# Altium PCB PSoC6-Cardiac-PCB.PcbDoc (part 1 of 2)
Units mm, origin at the board's own origin, x right, y up, seen from the top; angles counter-clockwise.
Board outline 36.98 x 46.23 mm, 4 copper layers (Top Layer, Layer 1, Layer 2, Bottom Layer), stack 1.058 mm thick; 58 components, 40 nets, 282 pads, 88 vias.
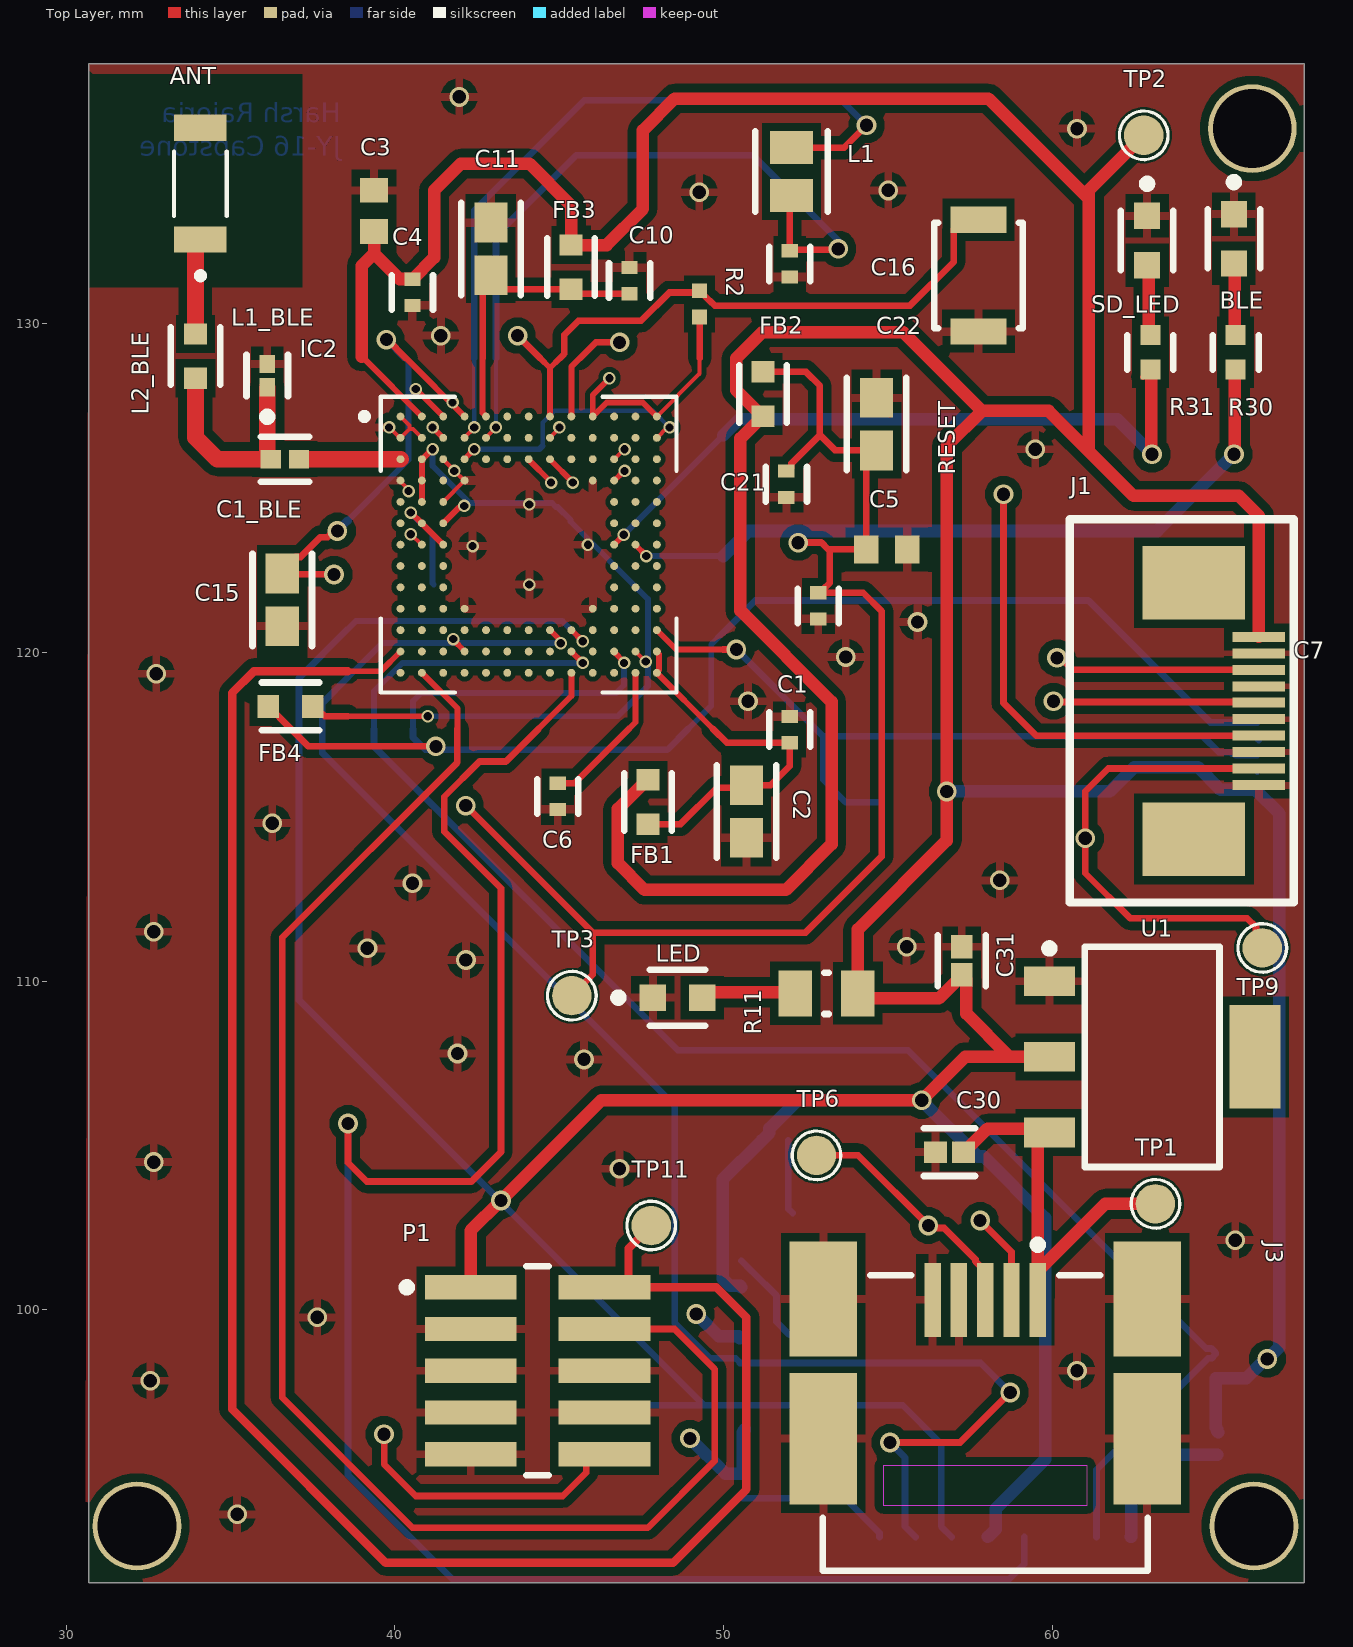
[diagram p0: Top Layer view]
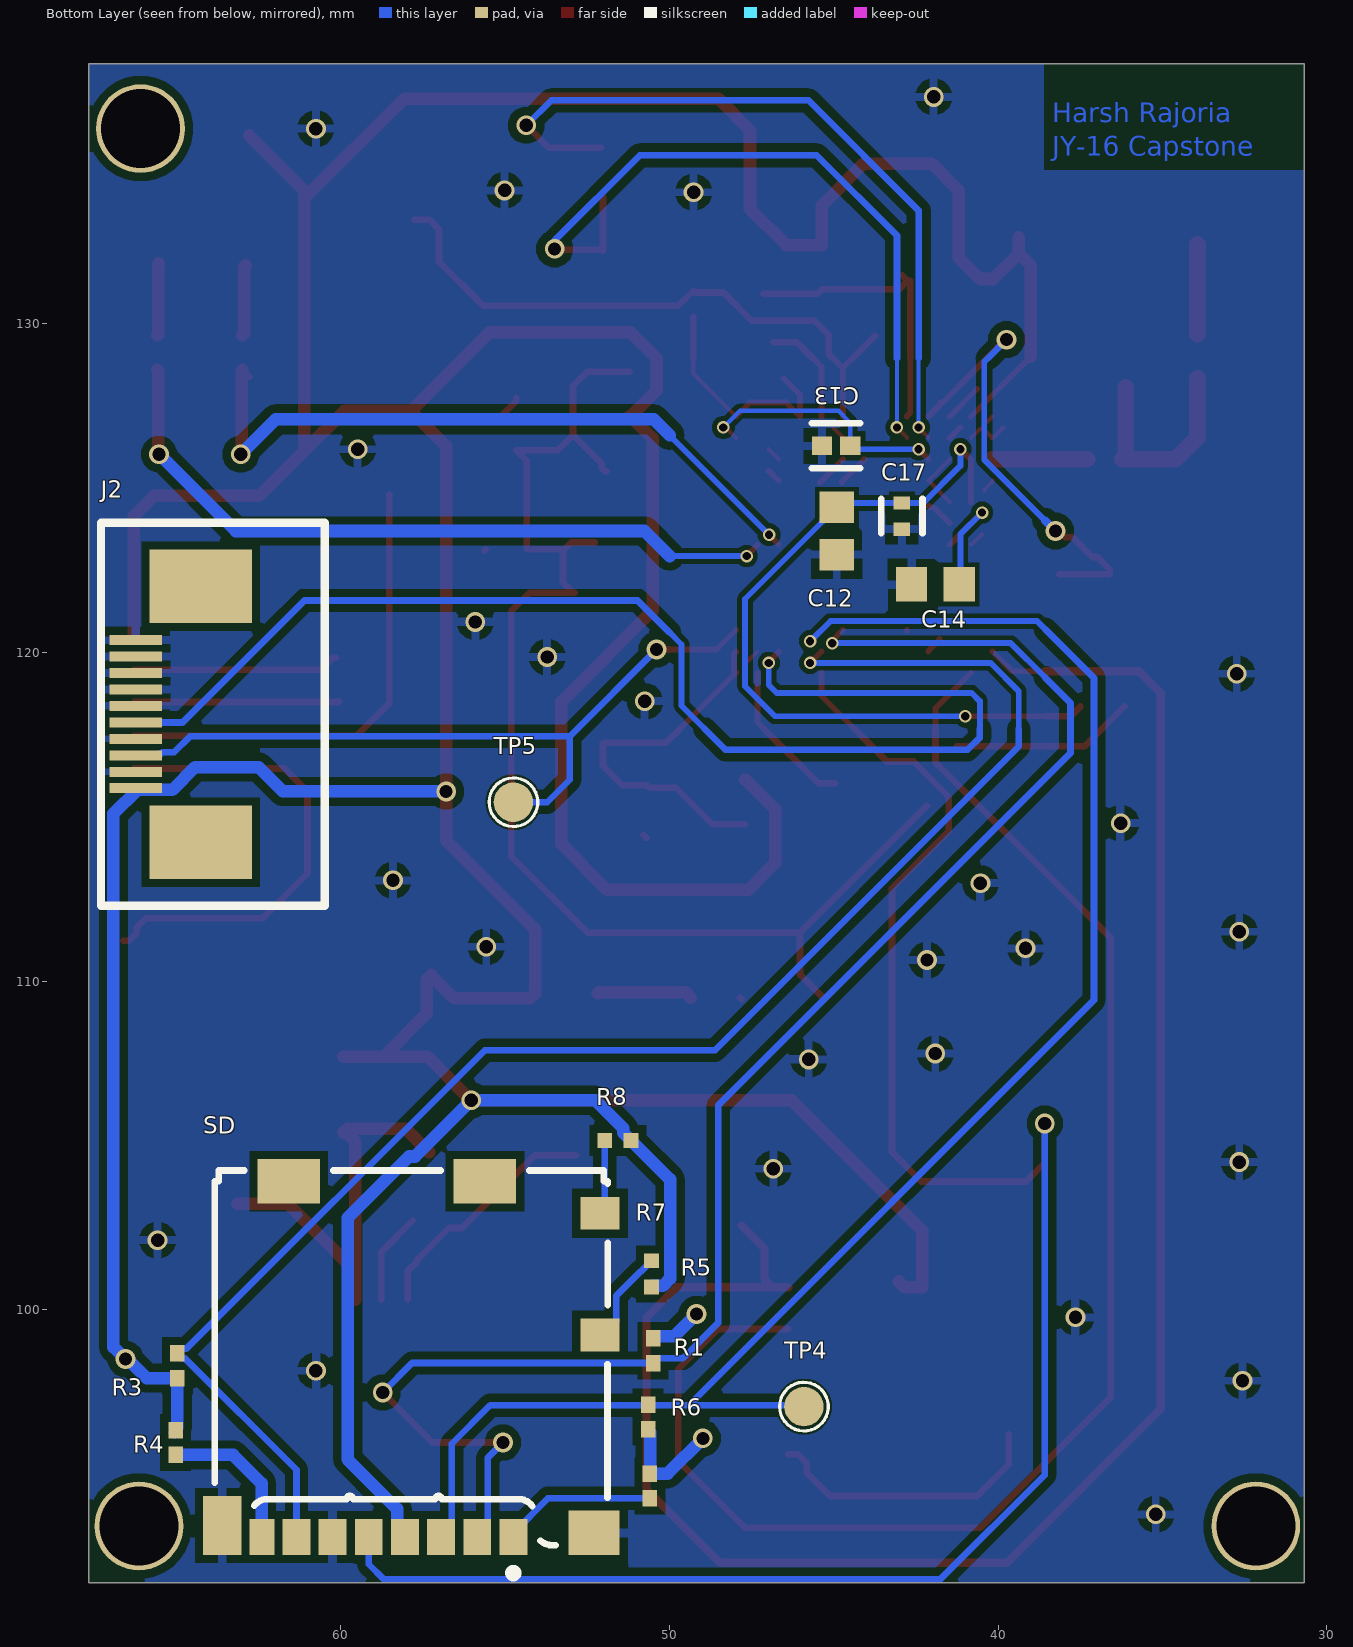
[diagram p1: Bottom Layer view, seen from below]
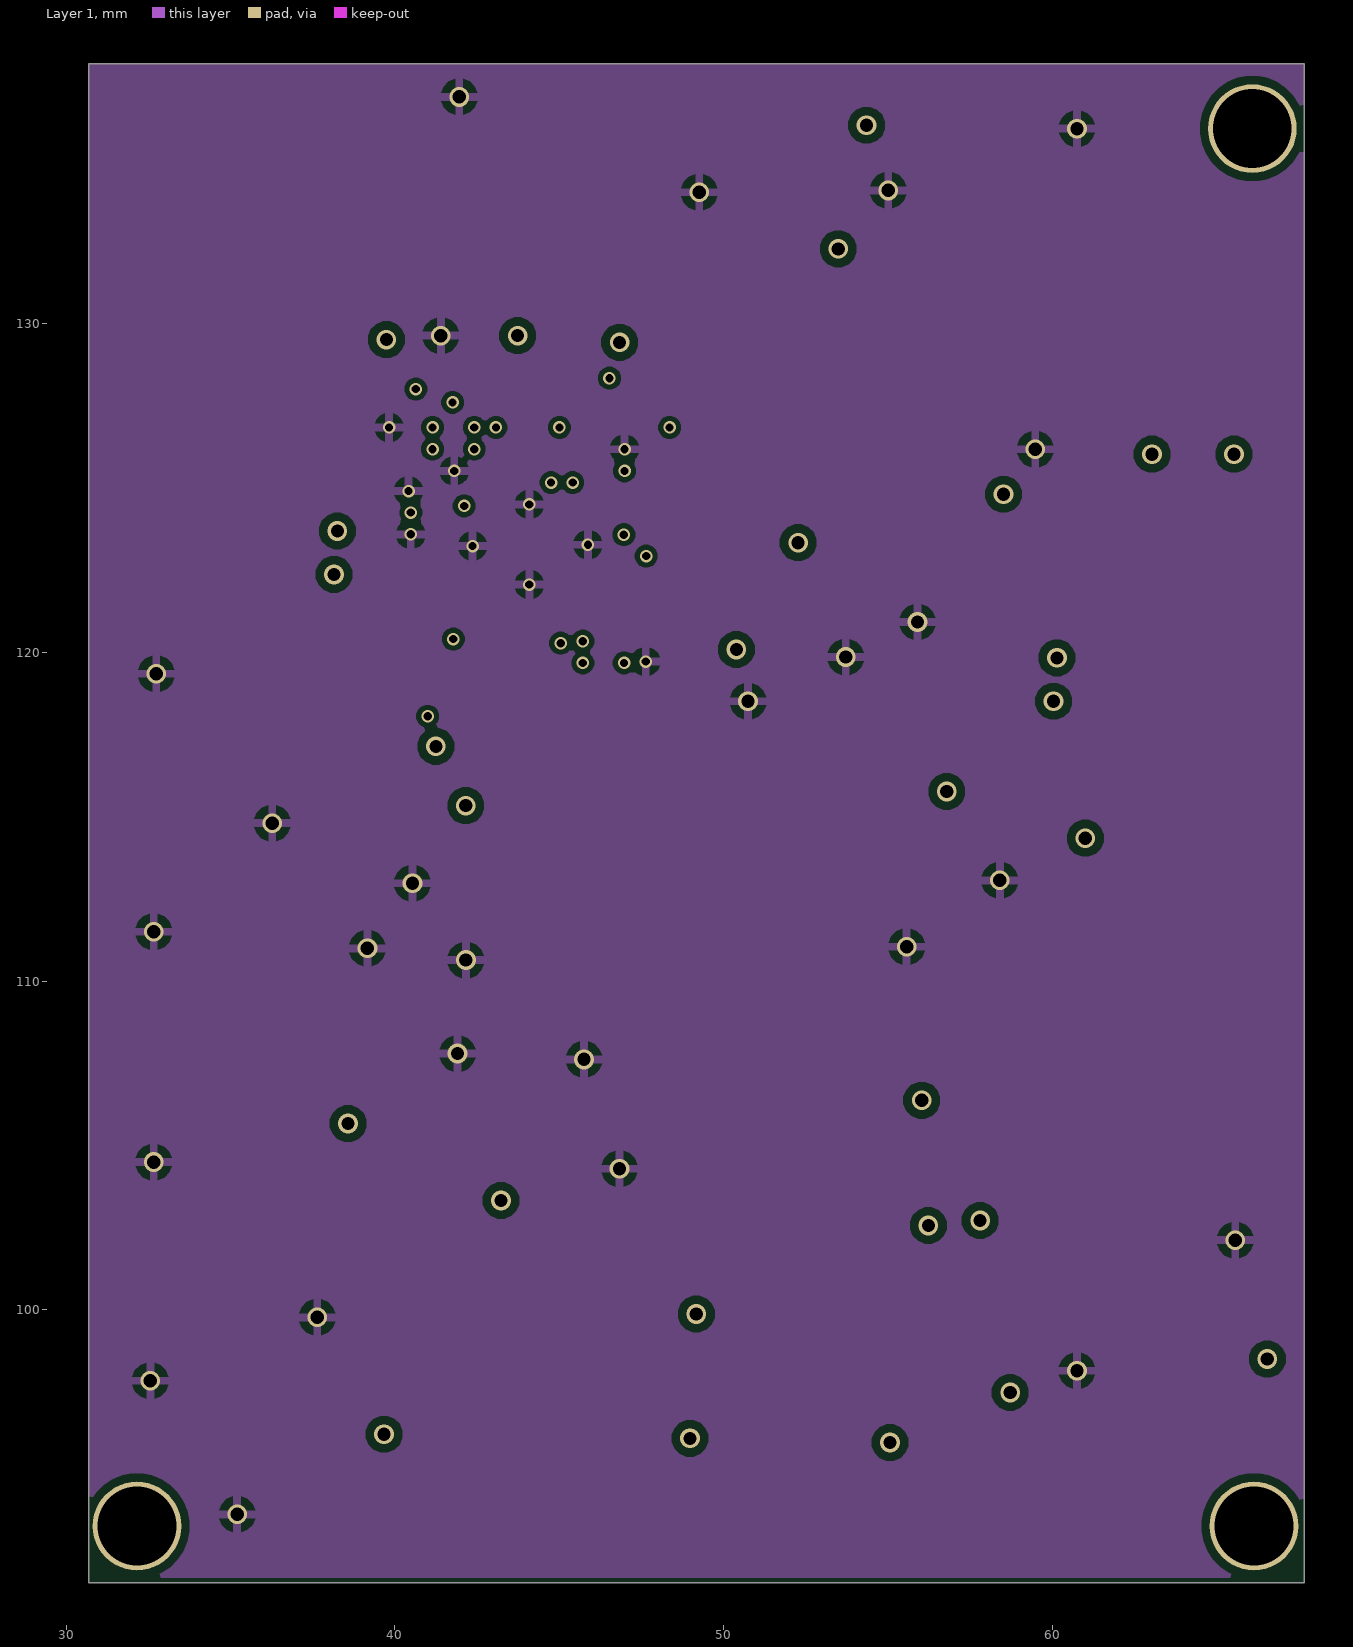
[diagram p2: Layer 1]
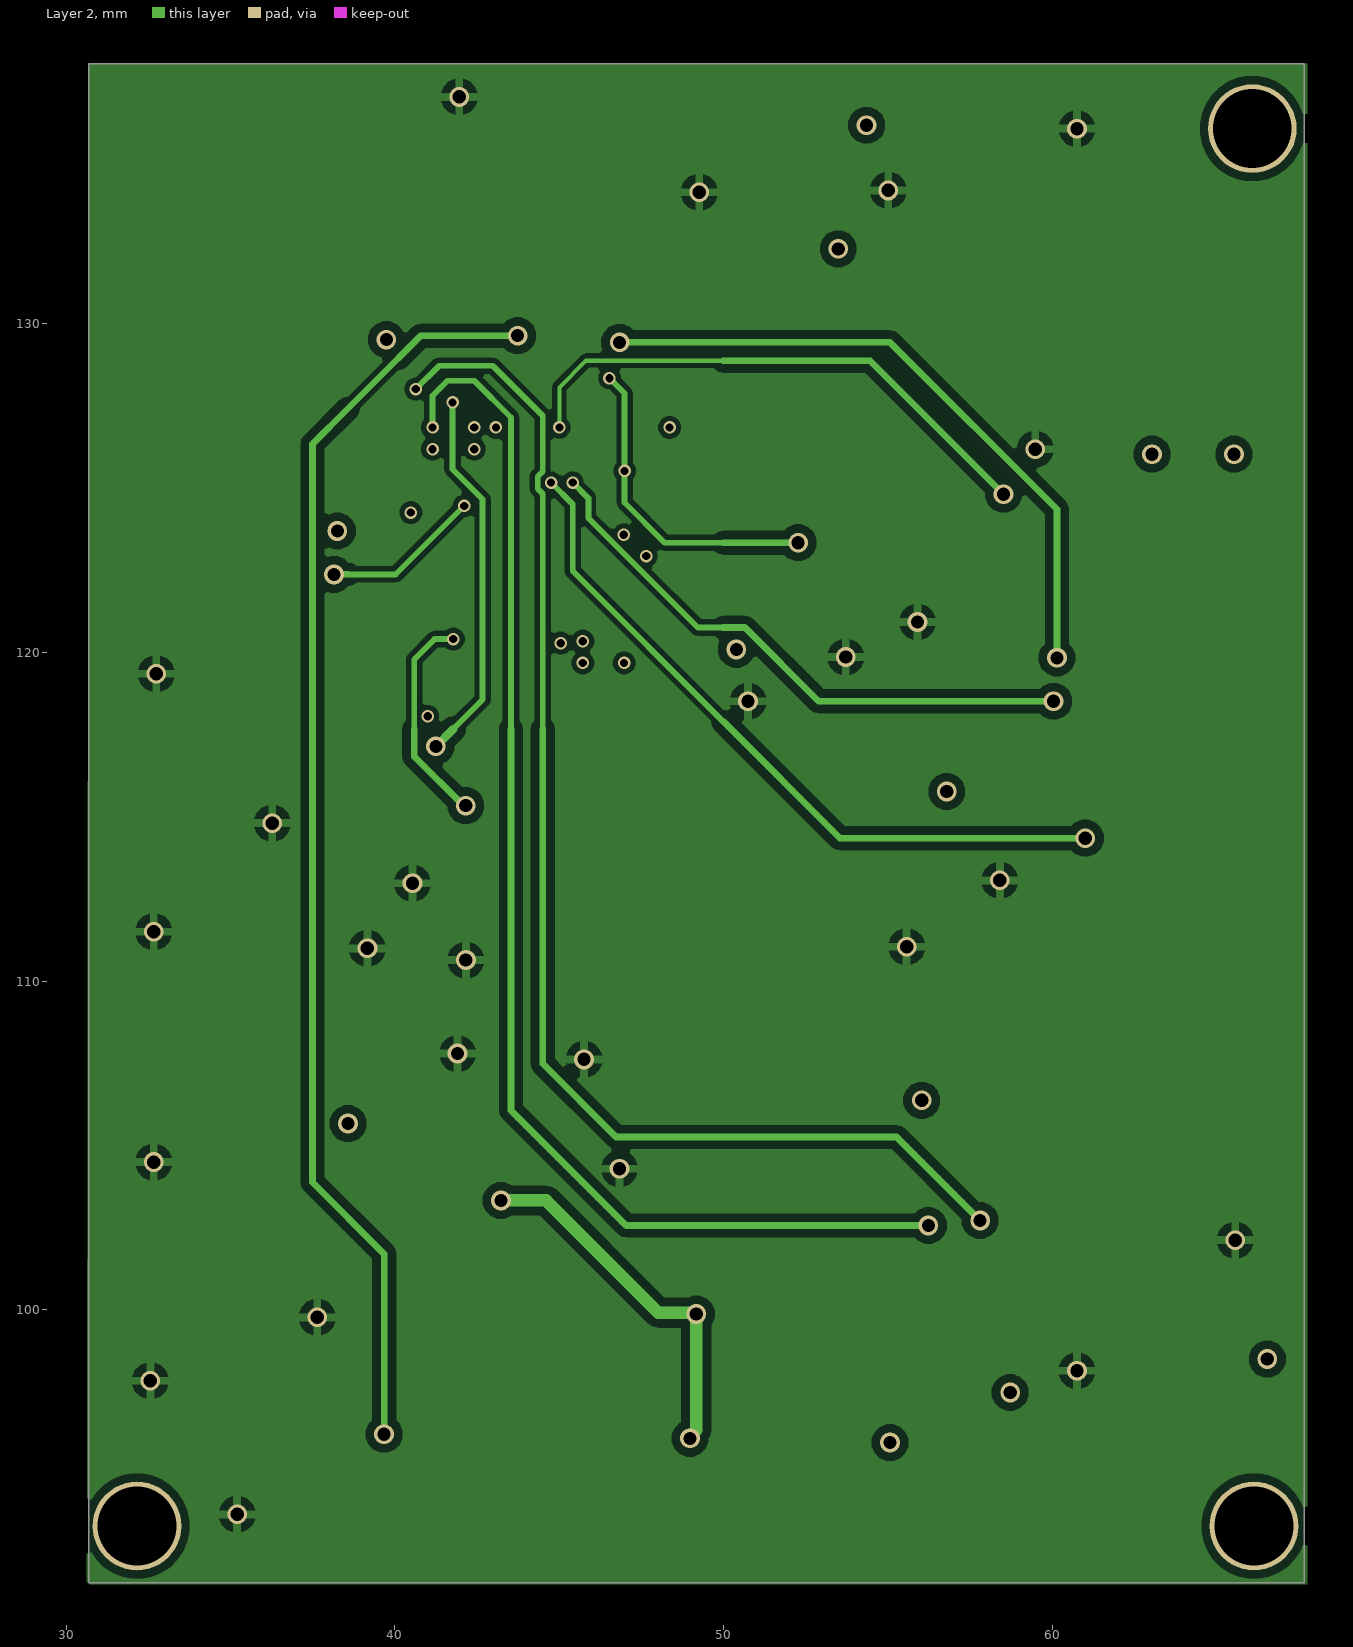
[diagram p3: Layer 2]
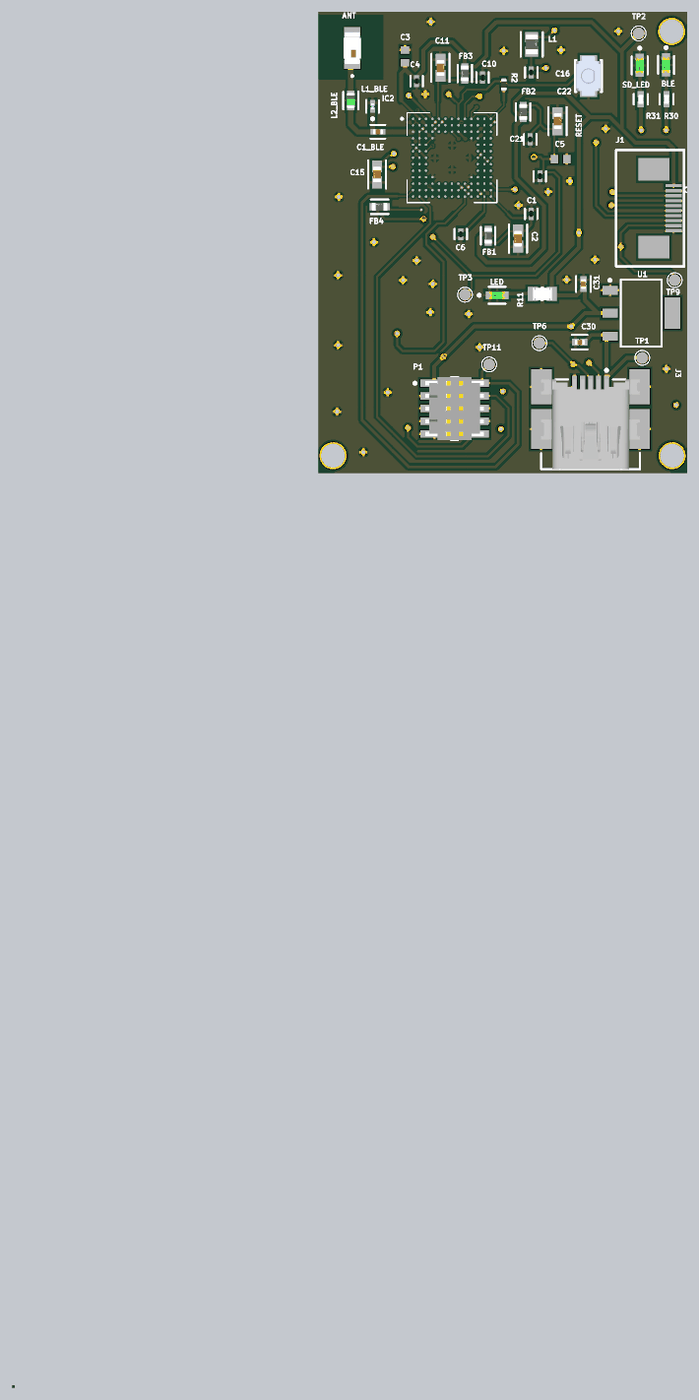
[diagram p4: 3D render of the assembled board from above, using the file's embedded part models]

## Layer stack, top to bottom
Top Solder: solder mask 0.0102, Solder Resist, Dk 3.5
Top Layer: signal copper 0.0356
Dielectric 2: prepreg 0.2984, FR-4, Dk 4.1
Layer 1: signal copper 0.035
Dielectric 1: dielectric 0.32, FR-4, Dk 4.8
Layer 2: signal copper 0.035
Dielectric 3: prepreg 0.2984, FR-4, Dk 4.1
Bottom Layer: signal copper 0.0356
Bottom Solder: solder mask 0.0102, Solder Resist, Dk 3.5

## Board outline
30.683,91.694 67.666,91.694 67.666,137.922 30.683,137.922
cut-out: 0,0 0.254,0 0.254,0.254 0,0.254

## Design rules (kind name [scope] priority, off if disabled: settings)
Clearance Clearance_BGA [WithinRoom('BGA')] p1: gap=0.152 ignorepadtopadclearanceinfootprint=TRUE except(0: Arc-Hole Track-Hole SMDPad-Hole THPad-Hole Via-Hole Fill-Hole Poly-Hole Region-Hole Text-Hole; 0.102: SMDPad-Via; 0.127: Arc-Via Track-Via; 0.254: THPad-THPad THPad-Via; 0.279: Via-Via)
Clearance [All] p2: gap=0.254 ignorepadtopadclearanceinfootprint=TRUE except(0: Arc-Hole Track-Hole SMDPad-Hole THPad-Hole Via-Hole Fill-Hole Poly-Hole Region-Hole Text-Hole; 0.152: Arc-SMDPad Track-SMDPad)
ComponentClearance [All] p1: gap=0 collisioncheckmode=3 verticalgap=0 showdistances=FALSE
PolygonConnect [All] p1: connectstyle=Relief reliefconductorwidth=0.254 reliefentries=4 polygonreliefangle="90 Angle" airgapwidth=0.254
RoomDefinition BGA [False] p1: confinementstyle=ConfineIn formatcopy=TRUE lockcomponents=FALSE outline 38.568,128.951 49.998,128.951 49.998,117.674 38.568,117.674
RoutingVias RoutingVias_BGA [WithinRoom('BGA')] p1: holewidth=0.25 width=0.38 viastyle="Through Hole" minholewidth=0.2 minwidth=0.3 maxholewidth=0.25 maxwidth=0.4
RoutingVias [All] p2: holewidth=0.4 width=0.6 viastyle="Through Hole" minholewidth=0.4 minwidth=0.6 maxholewidth=0.4 maxwidth=0.6
SolderMaskExpansion SolderMaskExpansion_BGA [WithinRoom('BGA')] p1: expansion=0.102 istentingtop=TRUE
SolderMaskExpansion [All] p2: expansion=0.102 istentingtop=FALSE
Width Width_RF [InNet('NetC1_BLE_1') or InNet('NetC1_BLE_2') or InNet('NetANT_1')] p1: maxlimit=0.508 minlimit=0.254 preferedwidth=0.254 toplayer_minwidth=0.508 toplayer_prefwidth=0.508 midlayer1_maxwidth=0.254 midlayer2_maxwidth=0.254 bottomlayer_maxwidth=0.254 minimp=50.000000 maximp=50.000000 favimp=50.000000
Width Width_BGA [WithinRoom('BGA')] p2: maxlimit=0.178 minlimit=0.127 preferedwidth=0.152 minimp=50.000000 maximp=50.000000 favimp=50.000000
Width Width_Power [InNet('VCC') Or InNet('VDD')] p3: maxlimit=0.508 minlimit=0.381 preferedwidth=0.381 minimp=50.000000 maximp=50.000000 favimp=50.000000
Width [All] p4: maxlimit=0.381 minlimit=0.203 preferedwidth=0.254 minimp=50.000000 maximp=50.000000 favimp=50.000000
29 further rules are at their usual default settings.

## Components (designator, comment, footprint, x,y, rotation, side; value= is the part's Value field where it differs from the comment)
ANT "2450AT18B100E" XDCR_2450AT18B100E 34.087,134.264 r90 top
BLE "BLE" FP-6_541-5092_01-4-MFG 65.532,132.588 r270 top
C1 "GRM155R71C104KA88D" FP-GRM15-MFG 52.019,117.653 r270 top value=0.10μF
C1_BLE "1.2pF" FP-GJM155-0_05-IPC_B 36.655,125.882 r180 top
C2 "10uF" FP-GRM188-0_1-e0_2_0_55-IPC_A 50.698,115.164 r270 top
C3 "GRM188R61E105KA12D" CAPC1608X90X35LL10T15 39.37,133.436 r270 top
C4 "GRM155R71C104KA88D" FP-GRM15-MFG 40.538,130.956 r90 top value=0.10μF
C5 "GRM188R61E105KA12D" CAPC1608X90X35LL10T15 54.966,123.139 r180 top
C6 "GRM155R71C104KA88D" FP-GRM15-MFG 44.958,115.621 r90 top value=0.10μF
C7 "GRM155R71C104KA88D" FP-GRM15-MFG 52.883,121.418 r90 top value=0.10μF
C10 "GRM155R71C104KA88D" FP-GRM15-MFG 47.142,131.318 r270 top value=0.10μF
C11 "GRM188R60J106ME47D" FP-GRM188-0_1-e0_2_0_55-IPC_A 42.926,132.283 r90 top
C12 "GRM188R61E105KA12D" CAPC1608X90X35ML10T15 44.907,123.698 r270 bottom value=1uF
C13 "GRM155R71C104KA88D" FP-GRM15-MFG 42.926,124.149 r270 bottom value=0.10μF
C14 "GRM188R61E105KA12D" CAPC1608X90X35ML10T15 41.91,122.072 r0 bottom value=1uF
C15 "GRM188R60J106ME47D" FP-GRM188-0_1-e0_2_0_55-IPC_A 36.576,121.604 r270 top
C16 "GRM155R71C104KA88D" FP-GRM15-MFG 52.019,131.826 r270 top value=0.10μF
C17 "GRM155R60J475ME47D" FP-GRM155-0_1-IPC_B 44.929,126.289 r180 bottom
C21 "0.1uF" FP-GRM15-MFG 51.918,125.12 r90 top value=0.10μF
C22 "10uF" FP-GRM188-0_1-e0_2_0_55-IPC_A 54.661,126.949 r90 top
C30 "10uF" FP-GRM155-0_15-IPC_B 56.875,104.8 r180 top
C31 "10uF" FP-GRM155-0_15-IPC_B 57.252,110.622 r90 top
FB1 "BLM18HE102SN1D" FP-BLM18-0_15-t0_8-MFG 47.701,115.454 r270 top
FB2 "BLM18HE102SN1D" FP-BLM18-0_15-t0_8-MFG 51.206,127.864 r270 top
FB3 "BLM18HE102SN1D" FP-BLM18-0_15-t0_8-MFG 45.364,131.724 r270 top
FB4 "BLM18HE102SN1D" FP-BLM18-0_15-t0_8-MFG 36.83,118.364 r180 top
IC2 "CY8C6347BZI-BLD54" BGAS124C65P13X13_900X900X100 44.074,123.282 r0 top locked
J1 "IMU FFC" ZF5S-10-01-X-WT 66.294,118.223 r270 top
J2 "PPG FFC" ZF5S-10-01-X-WT 66.243,118.123 r90 bottom
J3 "56579-0576" MOLX-56579-0576_V 57.965,100.305 r0 top
L1 "2.2uH" FP-LQM21PH_G0-IPC_C 52.07,134.635 r90 top
L1_BLE "2.7nH" FP-LQP03TG_02-IPC_A 36.119,128.424 r90 top
L2_BLE "3.3nH" FP-LQG18HH_00-MFG 33.934,129.017 r270 top
LED "LTST-C190GKT" FP-LTST-C190GKT-MFG 48.602,109.499 r0 top
P1 "FTSH-105-01-F-DV-K" SMTC-FTSH-105-01-L-DV-K_V 44.345,98.146 r270 top
R1 "10k" RESC1005X40X25LL05T10 50.648,96.743 r270 bottom
R2 "4.7k" RESC1005X40X25LL05T05 49.276,130.607 r270 top
R3 "10k" RESC1005X40X25LL05T10 64.973,98.298 r270 bottom
R4 "10k" RESC1005X40X25LL05T10 65.024,95.961 r90 bottom
R5 "10k" RESC1005X40X25LL05T10 50.495,98.755 r90 bottom
R6 "10k" RESC1005X40X25LL05T10 50.597,94.64 r90 bottom
R7 "4.7k" RESC1005X40X25LL05T05 50.546,101.092 r270 bottom
R8 "4.7k" RESC1005X40X25LL05T05 51.568,105.156 r180 bottom
R11 "CRCW08052K00FKEA" FP-CRCW0805-e3-IPC_B 53.137,109.626 r0 top
R30 "470" FP-CRCW0402-e3-MFG 65.583,129.134 r90 top
R31 "470" FP-CRCW0402-e3-MFG 62.992,129.134 r90 top
RESET "B3U-1000P" FP-B3U-1000P-MFG 57.76,131.47 r270 top (schematic designator SW1)
SD "104031-0811" MOLX-104031-0811_V 57.861,98.501 r180 bottom
SD_LED "SD" FP-6_541-5092_01-4-MFG 62.89,132.537 r270 top
TP1 "TestPoint" TestPoint 63.144,103.226 r0 top
TP2 "TestPoint" TestPoint 62.789,135.738 r0 top
TP3 "TestPoint" TestPoint 45.387,109.559 r0 top
TP4 "TestPoint" TestPoint 45.907,97.056 r180 bottom
TP5 "TestPoint" TestPoint 54.746,115.445 r180 bottom
TP6 "TestPoint" TestPoint 52.832,104.699 r0 top
TP9 "TestPoint" TestPoint 66.396,111.011 r0 top
TP11 "TestPoint" TestPoint 47.803,102.565 r0 top
U1 "ADP3338AKCZ-3.3-RL" ADI-KC-3_L 63.043,107.696 r0 top

## Footprints (in the part's own frame and the unit in brackets; to place one, negate y for a bottom-side part, rotate by r counter-clockwise, add the part's x,y. Pads: shape width x height; smd on the part's side, far side on the other; paste and mask are expansions set on the pad)
ADI-KC-3_L [mm] "SOT223, 4-Leads, Body 6.5x3.5mm, Pitch 2.3mm, IPC High Density"
  rect 1.55x0.9 smd: 1(-3.125,2.3) 2(-3.125,0) 3(-3.125,-2.3)
  rect 1.55x3.15 smd: 4(3.125,0)
  silkscreen extent -3.25,-3.35 2.05,3.42, body extent -1.85,-3.35 1.85,3.35, height 1.8
BGAS124C65P13X13_900X900X100 [mm]
  round 0.24 smd: A1(-3.9,3.9) A2(-3.25,3.9) A3(-2.6,3.9) A4(-1.95,3.9) A5(-1.3,3.9) A6(-0.65,3.9) A7(0,3.9) A8(0.65,3.9) A9(1.3,3.9) A10(1.95,3.9) A11(2.6,3.9) A12(3.25,3.9) A13(3.9,3.9) B1(-3.9,3.25) B2(-3.25,3.25) B3(-2.6,3.25) B4(-1.95,3.25) B5(-1.3,3.25) B6(-0.65,3.25) B7(0,3.25) B8(0.65,3.25) B9(1.3,3.25) B10(1.95,3.25) B11(2.6,3.25) B12(3.25,3.25) B13(3.9,3.25) C1(-3.9,2.6) C2(-3.25,2.6) C3(-2.6,2.6) C4(-1.95,2.6) C5(-1.3,2.6) C6(-0.65,2.6) C7(0,2.6) C8(0.65,2.6) C9(1.3,2.6) C10(1.95,2.6) C11(2.6,2.6) C12(3.25,2.6) C13(3.9,2.6) D1(-3.9,1.95) D2(-3.25,1.95) D3(-2.6,1.95) D4(-1.95,1.95) D10(1.95,1.95) D11(2.6,1.95) D12(3.25,1.95) D13(3.9,1.95) E1(-3.9,1.3) E2(-3.25,1.3) E3(-2.6,1.3) E11(2.6,1.3) E12(3.25,1.3) E13(3.9,1.3) F1(-3.9,0.65) F2(-3.25,0.65) F3(-2.6,0.65) F11(2.6,0.65) F12(3.25,0.65) F13(3.9,0.65) G1(-3.9,0) G2(-3.25,0) G3(-2.6,0) G11(2.6,0) G12(3.25,0) G13(3.9,0) H1(-3.9,-0.65) H2(-3.25,-0.65) H3(-2.6,-0.65) H11(2.6,-0.65) H12(3.25,-0.65) H13(3.9,-0.65) J1(-3.9,-1.3) J2(-3.25,-1.3) J3(-2.6,-1.3) J11(2.6,-1.3) J12(3.25,-1.3) J13(3.9,-1.3) K1(-3.9,-1.95) K2(-3.25,-1.95) K3(-2.6,-1.95) K4(-1.95,-1.95) K10(1.95,-1.95) K11(2.6,-1.95) K12(3.25,-1.95) K13(3.9,-1.95) L1(-3.9,-2.6) L2(-3.25,-2.6) L3(-2.6,-2.6) L4(-1.95,-2.6) L5(-1.3,-2.6) L6(-0.65,-2.6) L7(0,-2.6) L8(0.65,-2.6) L9(1.3,-2.6) L10(1.95,-2.6) L11(2.6,-2.6) L12(3.25,-2.6) L13(3.9,-2.6) M1(-3.9,-3.25) M2(-3.25,-3.25) M3(-2.6,-3.25) M4(-1.95,-3.25) M5(-1.3,-3.25) M6(-0.65,-3.25) M7(0,-3.25) M8(0.65,-3.25) M9(1.3,-3.25) M10(1.95,-3.25) M11(2.6,-3.25) M12(3.25,-3.25) M13(3.9,-3.25) N1(-3.9,-3.9) N2(-3.25,-3.9) N3(-2.6,-3.9) N4(-1.95,-3.9) N5(-1.3,-3.9) N6(-0.65,-3.9) N7(0,-3.9) N8(0.65,-3.9) N9(1.3,-3.9) N10(1.95,-3.9) N11(2.6,-3.9) N12(3.25,-3.9) N13(3.9,-3.9)
  silkscreen extent -5.1,-4.5 4.5,4.5
CAPC1608X90X35LL10T15 [mm] "Chip Capacitor, 2-Leads, Body 1.60x0.80mm, IPC High Density"
  rect 0.75x0.85 smd: 1(-0.625,0) 2(0.625,0)
  body extent -0.85,-0.45 0.85,0.45, height 0.9
CAPC1608X90X35ML10T15 [mm] "Chip Capacitor, 2-Leads, Body 1.60x0.80mm, IPC Low Density"
  rect 0.95x1.05 smd: 1(-0.725,0) 2(0.725,0)
  body extent -0.85,-0.45 0.85,0.45, height 0.9
FP-6_541-5092_01-4-MFG [mm]
  rect 0.8x0.8 smd paste+0 mask+0: 1(-0.75,0) 2(0.75,0)
  silkscreen extent -1.85,-0.8 0.9,0.8, body extent -1.25,-0.6 1.25,0.6, height 0.25
FP-B3U-1000P-MFG [mm]
  rect 0.8x1.7 smd paste+0 mask+0: 1(-1.7,0) 2(1.7,0)
  silkscreen extent -1.6,-1.35 1.6,1.35, body extent -2.2,-1.45 2.2,1.45, height 0.25
FP-BLM18-0_15-t0_8-MFG [mm]
  rect 0.65x0.7 smd paste+0 mask+0: 1(-0.675,0) 2(0.675,0)
  silkscreen extent -0.87,-0.72 0.87,0.72, body extent -1.1,-0.58 1.1,0.58, height 0.25
FP-CRCW0402-e3-MFG [mm]
  rect 0.6x0.6 smd paste+0 mask+0: 1(-0.525,0) 2(0.525,0)
  silkscreen extent -0.53,-0.7 0.53,0.7, body extent -0.92,-0.4 0.92,0.4, height 0.25
FP-CRCW0805-e3-IPC_B [mm]
  rect 1.007x1.408 smd paste+0 mask+0: 1(-0.951,0) 2(0.951,0)
  silkscreen extent -0.07,-0.63 0.07,0.63, body extent -1.7,-0.95 1.7,0.95, height 0.25
FP-GJM155-0_05-IPC_B [mm]
  rect 0.615x0.572 smd paste+0 mask+0: 1(-0.429,0) 2(0.429,0)
  silkscreen extent -0.74,-0.69 0.74,0.69, body extent -0.89,-0.44 0.89,0.44, height 0.25
FP-GRM15-MFG [mm]
  rect 0.4x0.5 smd paste+0 mask+0: 1(-0.4,0) 2(0.4,0)
  silkscreen extent -0.53,-0.63 0.53,0.63, body extent -0.7,-0.38 0.7,0.38, height 0.25
FP-GRM155-0_1-IPC_B [mm]
  rect 0.615x0.572 smd paste+0 mask+0: 1(-0.429,0) 2(0.429,0)
  silkscreen extent -0.74,-0.69 0.74,0.69, body extent -0.5,-0.25 0.5,0.25, height 0.6
FP-GRM155-0_15-IPC_B [mm]
  rect 0.704x0.658 smd paste+0 mask+0: 1(-0.427,0) 2(0.427,0)
  silkscreen extent -0.78,-0.73 0.78,0.73, body extent -0.93,-0.48 0.93,0.48, height 0.25
FP-GRM188-0_1-e0_2_0_55-IPC_A [mm]
  rect 1.208x1.012 smd paste+0 mask+0: 1(-0.802,0) 2(0.802,0)
  silkscreen extent -1.41,-0.91 1.41,0.91, body extent -1.91,-1.01 1.91,1.01, height 0.25
FP-LQG18HH_00-MFG [mm]
  rect 0.65x0.7 smd paste+0 mask+0: 1(-0.675,0) 2(0.675,0)
  silkscreen extent -0.87,-0.75 0.87,0.75, body extent -1.1,-0.58 1.1,0.58, height 0.25
FP-LQM21PH_G0-IPC_C [mm]
  rect 1.006x1.308 smd paste+0 mask+0: 1(-0.726,0) 2(0.726,0)
  silkscreen extent -1.23,-1.1 1.23,1.1, body extent -1.33,-0.8 1.33,0.8, height 0.25
FP-LQP03TG_02-IPC_A [mm]
  rect 0.554x0.463 smd paste+0 mask+0: 1(-0.354,0) 2(0.354,0)
  silkscreen extent -1.37,-0.63 0.63,0.63, body extent -0.83,-0.43 0.83,0.43, height 0.25
FP-LTST-C190GKT-MFG [mm]
  rect 0.8x0.8 smd paste+0 mask+0: 1(-0.75,0) 2(0.75,0)
  silkscreen extent -1.92,-0.85 0.85,0.85, body extent -1.25,-0.55 1.25,0.55, height 0.25
MOLX-56579-0576_V [mm] "SMD, 5-Leads, body 9.9x9mm, Pitch 0.8mm"
  rect 0.5x2.25 smd: 1(1.6,0) 2(0.8,0) 3(0,0) 4(-0.8,0) 5(-1.6,0)
  rect 2.05x3.5 smd: 6(4.925,0.025) 7(-4.925,0.025)
  rect 2.05x4 smd: 8(4.925,-4.225) 9(-4.925,-4.225)
  Top Layer keep-out region: -3.1,-6.25 3.1,-6.25 3.1,-5.05 -3.1,-5.05
  silkscreen extent -4.95,-8.25 4.95,1.8, body extent -4.95,-8.25 4.95,0.75, height 3.93
MOLX-104031-0811_V [mm] "Micro SD, 8-Leads, Body 11.95x11.4mm, Pitch 1.1mm"
  rect 0.85x1.1 smd: 1(3.113,-5.412) 2(2.013,-5.412) 3(0.913,-5.412) 4(-0.188,-5.412) 5(-1.288,-5.412) 6(-2.387,-5.412) 7(-3.487,-5.412)
  rect 0.75x1.1 smd: 8(-4.537,-5.412)
  rect 1.2x1 smd: 9(5.748,0.738) 10(5.748,4.438)
  rect 1.55x1.35 smd: 11(5.573,-5.287)
  rect 1.17x1.8 smd: 12(-5.747,-5.062)
  rect 1.9x1.35 smd: 13(-3.722,5.413) 14(2.248,5.413)
  silkscreen extent -5.97,-6.64 5.98,5.74, body extent -5.97,-5.66 5.98,5.74, height 1.45
RESC1005X40X25LL05T05 [mm] "Chip Resistor, 2-Leads, Body 1.05x0.55mm, IPC High Density"
  rect 0.45x0.45 smd: 1(-0.4,0) 2(0.4,0)
  body extent -0.53,-0.28 0.53,0.28, height 0.4
RESC1005X40X25LL05T10 [mm] "Chip Resistor, 2-Leads, Body 1.00x0.50mm, IPC High Density"
  rect 0.5x0.45 smd: 1(-0.375,0) 2(0.375,0)
  body extent -0.53,-0.27 0.53,0.28, height 0.4
SMTC-FTSH-105-01-L-DV-K_V [mm] "CONN, 10-Leads, Body 6.35x3.43mm, Pitch 1.27mm"
  rect 0.74x2.79 smd: 1(-2.54,-2.035) 2(-2.54,2.035) 3(-1.27,-2.035) 4(-1.27,2.035) 5(0,-2.035) 6(0,2.035) 7(1.27,-2.035) 8(1.27,2.035) 9(2.54,-2.035) 10(2.54,2.035)
  silkscreen extent -3.17,-4.1 3.17,0.34, body extent -3.17,-2.92 3.18,2.92, height 6.12
TestPoint [mm]
  round 1.2 smd paste-0.015: TP?(0,0)
  silkscreen extent -0.74,-0.74 0.74,0.74, body extent -0.6,-0.6 0.6,0.6, height 0.03
XDCR_2450AT18B100E [mm]
  rect 0.8x1.6 smd: 1(-1.7,0) 2(1.7,0)
  silkscreen extent -2.9,-0.8 0.98,0.8, body extent -1.6,-0.8 1.6,0.8, height 0.7
ZF5S-10-01-X-WT [mil]
  rect 12x63 smd mask+2: 1(-88.65,0) 2(-68.95,0) 3(-49.25,0) 4(-29.55,0) 5(-9.85,0) 6(9.85,0) 7(29.55,0) 8(49.25,0) 9(68.95,0) 10(88.65,0)
  rect 88x123 smd mask+2: G1(-153.5,-78) G2(153.5,-78)
  silkscreen extent -230,-227 230,42

## Part data
ANT: "2.4GHz - Chip RF Antenna 2.4GHz ~ 2.5GHz 0.5dBi Solder Surface Mount", Package=None, Availability="In Stock", Check_prices=https://www.snapeda.com/parts/2450AT18B100E/Johanson+Technology+Inc./view-part/?ref=eda, MF="Johanson Technology", MP=2450AT18B100E, Price=None, Purchase-URL=https://pricing.snapeda.com/search/part/2450AT18B100E/?ref=eda, SnapEDA_Link=https://www.snapeda.com/parts/2450AT18B100E/Johanson+Technology+Inc./view-part/?ref=snap
BLE: library part CMP-02520-000011-1, "LED GREEN 0603 SMD", Ambient Temperature Range High=+85°C, Ambient Temperature Range Low=-35°C, Colour="Yellow Green", Forward Current=20mA, Forward Voltage=2V, Manufacturer=Vishay, Manufacturer Part Number=VLMG1300-GS08, Package=6.541-5092.01-4, Power Dissipation=75mW, Reverse Voltage=5V, Temperature="-35°C to +85°C", Automotive=No, Category=Diode, ComponentLink2Description=Datasheet, ComponentLink2URL=http://www.vishay.com/docs/82437/vlmo1300.pdf, Device Class L1=Optoelectronics, Device Class L2=LEDs, Device Class L3=unset, Digikey Description="LED GREEN 0603 SMD", Height=1mm, Lead Free=Yes, Led Orientation="Top View", Luminous Intensity=35mcd, Mouser Description="LED; SMD; 0603; yellow green; 18-35mcd; 1.6x0.8x0.8mm; 130°; 2÷2.4V", Octopart=https://octopart.com/vlmg1300-gs08-vishay-21709199, Peak Emmision Wavelength=574nm, RoHS=TRUE, Temperature Range High=+85°C, Temperature Range Low=-35°C, Viewing Angle=130°, Wavelength=571nm
C1 C4 C6 C7 C10 C13 C16: library part CMP-2100-03641-2, "CAP CER 0.1UF 16V X7R 0402", Capacitance=0.10μF, Manufacturer=Murata, Package=GRM15, Temperature="-55°C to +125°C", Temperature Characteristic=X7R, Temperature Range High=+125°C, Temperature Range Low=-55°C, Tolerance=10%, Voltage Rating=16Vdc, Category=Cap, ComponentLink2Description=Datasheet, ComponentLink2URL=https://search.murata.co.jp/Ceramy/image/img/A01X/G101/ENG/GRM155R71H471KA01-01A.pdf, Device Class L1="Passive Components", Device Class L2=Capacitors, Device Class L3="Ceramic Capacitors", Digikey Description="CAP CER 0.1UF 16V X7R 0402", Height=0.55mm, Ipc Land Pattern Name=CAPC10050X219, Lead Free=yes, Manufacturer Part Number=GRM155R71C104KA88D, Material=Ceramic, Mouser Description="0402 0.1 uF 16V ±10 % Tolerance X7R SMT Multilayer Ceramic Capacitor", Octopart=https://octopart.com/grm155r71c104ka88d-murata-196880, RoHS=TRUE, Standoff Height=0mm
C1_BLE: library part CMP-2008-03813-2, "Multi-Layer Ceramic Capacitor 1.2pF C0G  ±0.1pF 0402 Paper T/R", Case Code (Imperial)=0402, Case Code (Metric)=1005, Dielectric=C0G, Max Operating Temperature=125°C, Min Operating Temperature=-55°C, Package Quantity=10000, Temperature Coefficient=30ppm/°C, Voltage=50V, Capacitance=1.2pF, Case/Package=0402, Depth=0.5mm, Height=0.5mm, Lead Free="Lead Free", Lead Pitch=0.3mm, Length=1mm, Mount="Surface Mount", Number of Pins=2, Packaging="Tape and Reel", Radiation Hardening=No, REACH SVHC="No SVHC", Termination=SMD/SMT, Thickness=0.022inch, Voltage Rating=50V, Voltage Rating (DC)=50V, Weight=2.3E-05oz, Width=0.5mm
C2 C22: library part CMP-2006-02792-2, "Chip Multilayer Ceramic Capacitors for General Purpose, 0603, 10uF, X5R, 15%, 20%, 6.3V", Case Code (Imperial)=0603, Case Code (Metric)=1608, Dielectric=X5R, Max Operating Temperature=85°C, Min Operating Temperature=-55°C, Package Quantity=4000, Tolerance=20%, Voltage=6.3V, Capacitance=10uF, Case/Package=0603, Depth=0.8mm, Height=0.8mm, Lead Free="Lead Free", Length=1.6mm, Material=Ceramic, Mount="Surface Mount", Packaging="Tape and Reel", Radiation Hardening=No, REACH SVHC="No SVHC", Termination=SMD/SMT, Thickness=0.035inch, Voltage Rating=6.3V, Voltage Rating (DC)=6.3V, Width=0.031inch
C3 C5 C12 C14: library part CMP-2006-02459-1, Manufacturer=Murata, Part Number=GRM188R61E105KA12D
C11 C15: library part CMP-2006-02792-2, "Chip Multilayer Ceramic Capacitors for General Purpose, 0603, 10uF, X5R, 15%, 20%, 6.3V", Capacitance=10uF, Case Code (Imperial)=0603, Case Code (Metric)=1608, Dielectric=X5R, Max Operating Temperature=85°C, Min Operating Temperature=-55°C, Package Quantity=4000, Tolerance=20%, Voltage=6.3V, Case/Package=0603, Depth=0.8mm, Height=0.8mm, Lead Free="Lead Free", Length=1.6mm, Material=Ceramic, Mount="Surface Mount", Packaging="Tape and Reel", Radiation Hardening=No, REACH SVHC="No SVHC", Termination=SMD/SMT, Thickness=0.035inch, Voltage Rating=6.3V, Voltage Rating (DC)=6.3V, Width=0.031inch
C17: library part CMP-2008-04549-2, "Chip Multilayer Ceramic Capacitors for General Purpose, 0402, 4.7uF, X5R, 15%, 20%, 6.3V", Capacitance=4.7uF, Case Code (Imperial)=0402, Case Code (Metric)=1005, Dielectric=X5R, Max Operating Temperature=85°C, Min Operating Temperature=-55°C, Package Quantity=10000, Tolerance=20%, Voltage=6.3V, Case/Package=0402, Contact Plating=Tin, Depth=0.5mm, Height=0.5mm, Lead Free="Lead Free", Length=1mm, Mount="Surface Mount", Packaging="Tape and Reel", REACH SVHC="No SVHC", Termination=SMD/SMT, Thickness=0.022inch, Voltage Rating=6.3V, Voltage Rating (DC)=6.3V, Weight=0.000212oz, Width=0.02inch
C21: library part CMP-2100-03641-2, "CAP CER 0.1UF 16V X7R 0402", Capacitance=0.10μF, Manufacturer=Murata, Manufacturer Part Number=GRM155R71C104KA88D, Package=GRM15, Temperature="-55°C to +125°C", Temperature Characteristic=X7R, Temperature Range High=+125°C, Temperature Range Low=-55°C, Tolerance=10%, Voltage Rating=16Vdc, Category=Cap, ComponentLink2Description=Datasheet, ComponentLink2URL=https://search.murata.co.jp/Ceramy/image/img/A01X/G101/ENG/GRM155R71H471KA01-01A.pdf, Device Class L1="Passive Components", Device Class L2=Capacitors, Device Class L3="Ceramic Capacitors", Digikey Description="CAP CER 0.1UF 16V X7R 0402", Height=0.55mm, Ipc Land Pattern Name=CAPC10050X219, Lead Free=yes, Material=Ceramic, Mouser Description="0402 0.1 uF 16V ±10 % Tolerance X7R SMT Multilayer Ceramic Capacitor", Octopart=https://octopart.com/grm155r71c104ka88d-murata-196880, RoHS=TRUE, Standoff Height=0mm
C30 C31: library part CMP-06035-012416-1, "GRM155R60J106ME15D / Chip Multilayer Ceramic Capacitors for General Purpose, 0402, 10uF, X5R, 15%, 20%, 6.3V", Case Code (Imperial)=0402, Case Code (Metric)=1005, Dielectric=X5R, Max Operating Temperature=85°C, Min Operating Temperature=-55°C, Tolerance=20%, Voltage Rating=6.3V, Capacitance=10uF, Case/Package=0402, Length=0.039inch, Mount="Surface Mount", Packaging="Tape and Reel", Thickness=0.026inch, Voltage Rating (DC)=6.3V, Width=0.02inch
FB1 FB2 FB3 FB4: library part CMP-0686-00363-3, "Chip Ferrite Bead, 0603, 1000Ω @ 100MHz, 0.35Ω, 25%, 600mA", Case Code (Imperial)=0603, Case Code (Metric)=1608, Current Rating=600mA, DC Resistance (DCR)=350mR, Max Operating Temperature=125°C, Min Operating Temperature=-55°C, Package Quantity=1, Test Frequency=100MHz, Tolerance=25%, Case/Package=0603, Core Material=Ferrite, DC Current=600mA, Depth=0.8mm, Height=0.8mm, Impedance=1kR, Lead Free="Lead Free", Length=1.6mm, Material=Steel, Max Current Rating=600mA, Max DC Current=600mA, Military Standard=Not, Number of Circuits=1, Number of Lines=1, Number of Pins=2, Packaging="Tape and Reel", Radiation Hardening=No, REACH SVHC="No SVHC", Termination=SMD/SMT, Width=0.8mm
IC2: "Integrated Circuit", Manufacturer_Name="Cypress Semiconductor", Mouser Part Number=727-CY8C6347BZIBLD54, Arrow Part Number=CY8C6347BZI-BLD54, Arrow Price/Stock=https://www.arrow.com/en/products/cy8c6347bzi-bld54/cypress-semiconductor, Datasheet Link=https://www.arrow.com/en/products/cy8c6347bzi-bld54/cypress-semiconductor, Height=1mm, Manufacturer_Part_Number=CY8C6347BZI-BLD54, Mouser Price/Stock=https://www.mouser.co.uk/ProductDetail/Cypress-Semiconductor/CY8C6347BZI-BLD54/?qs=XeJtXLiO41TbiRPpjrRqiA%3D%3D
J1 J2: library part ZF5S-10-01-X-WT, "ZERO INSERTION FORCE 0.5MM ASSEMBLY, 01 LEAD STYLE.", Manufacturer=SAMTEC, CREATED="January 30, 2015 - Wendy Xin", PCB DECAL=ZF5S-10-01-X-WT
J3: library part CMP-2000-05643-1, "USB Connector, 30 V, 1 A, 0 to 50 degC, 5-Pin SMD, RoHS, Tape and Reel", Color=Gray, Current Rating=1A, Flammability Rating=UL94V-0, Insulation Resistance=100MOhms, Manufacturer=Molex, Operating Temperature Range=0Cto+50C, Package Description="5-Pin Surface Mount Device, Body 9.9 x 9 mm, Pitch 0.8 mm", Voltage Rating=30VAC/DC, Brand=Molex, Connector Type=MiniUSBTypeABReceptacle, Contact Material=CopperAlloy, Contact Plating=Gold, Datasheet URL=http://www.molex.com/pdm_docs/sd/565790576_sd.pdf, Datasheet Version="Rev. E, 04/2006", Factory Pack Quantity=800, Features=MetalshieldingforESDprotection, Gender=Female, Manufacturer URL=http://www.molex.com/, Mounting Angle=Right, Mounting Technology=SurfaceMount, Number of Contacts=5Contact, Number of Ports=1Port, Package Reference=56579-0576, Packaging=Reel, Product=MiniUSBTypeABConnectors, Product Category=USBConnectors, RoHS=Details, Series=56579, Standard=USB, Termination Style=SolderTab
L1: library part CMP-06042-016317-1, "Multilayer Type Inductor for Power Lines, 0805 (2012), 2.2μH, 30%, 0.288Ω, 0.8A", Case Code (Imperial)=0805, Case Code (Metric)=2012, Current Rating=800mA, DC Resistance (DCR)=288mR, Inductance Tolerance=30%, Max Operating Temperature=125°C, Min Operating Temperature=-55°C, Package Quantity=4000, Self Resonant Frequency=40MHz, Test Frequency=1MHz, Case/Package=0805, Core Material=Ferrite, DC Current=800mA, Depth=1.4mm, Height=0.9mm, Height - Seated (Max)=0.039inch, Inductance=2.2uH, Lead Free="Lead Free", Length=2mm, Max DC Current=800mA, Military Standard=Not, Mount="Surface Mount", Packaging="Tape and Reel", Radiation Hardening=No, REACH SVHC="No SVHC", RoHS Compliant=Yes, Series=LQM, Shielding=Shielded, Termination=SMD/SMT, Tolerance=30%, Width=0.049inch
L1_BLE: library part CMP-06042-013213-1, "Film type RF Inductor 2.7nH ±0.1nH 500mA 0.2Ω 0201 (0603)", Case Code (Imperial)=0201, Case Code (Metric)=0603, Current=350mA, Current Rating=500mA, DC Resistance (DCR)=200mR, Max Operating Temperature=125°C, Min Operating Temperature=-55°C, Package Quantity=15000, Resistor Type="Thin Film", Self Resonant Frequency=6GHz, Test Frequency=500MHz, Tolerance=3%, Case/Package=0201, Core Material=Non-Magnetic, DC Current=500mA, Depth=0.33mm, Height=0.3mm, Height - Seated (Max)=0.013inch, Inductance=2.7nH, Lead Free="Lead Free", Length=0.024inch, Max DC Current=500mA, Military Standard=Not, Mount="Surface Mount", Packaging="Tape and Reel", Q Factor=14, Radiation Hardening=No, REACH SVHC="No SVHC", Shielding=Unshielded, Termination=SMD/SMT, Width=0.3mm
L2_BLE: library part CMP-06042-009861-1, "Multilayer type RF Inductor 3.3nH ±0.3nH 0.12Ω 1000mA 0603", Case Code (Imperial)=0603, Case Code (Metric)=1608, Current Rating=500mA, DC Resistance (DCR)=150mR, Max Operating Temperature=85°C, Min Operating Temperature=-55°C, Package Quantity=4000, Self Resonant Frequency=6GHz, Test Frequency=100MHz, Case/Package=0603, Core Material=Air, DC Current=500mA, Depth=0.95mm, Height=0.8mm, Height - Seated (Max)=0.037inch, Inductance=3.3nH, Lead Free="Lead Free", Length=1.6mm, Max DC Current=500mA, Military Standard=Not, Mount="Surface Mount", Packaging="Tape and Reel", Q Factor=12, Radiation Hardening=No, REACH SVHC="No SVHC", Shielding=Unshielded, Termination=SMD/SMT, Width=0.8mm
LED: library part CMP-22017-000005-2, "LED GREEN CLEAR CHIP SMD", Case Code (Imperial)=0603, Case Code (Metric)=1608, Color=Green, Forward Current=30mA, Forward Voltage=2.1V, Lens Color=Colorless, Max Operating Temperature=85°C, Min Operating Temperature=-55°C, Package Quantity=1, Power Dissipation=100mW, Reverse Voltage=5V, Test Current=10mA, Voltage=2V, Case/Package=0603, Depth=0.8mm, Dominant Wavelength=569nm, Height=0.8mm, Illumination Color=Green, Lead Free="Lead Free", Length=1.6mm, Lens Style=Clear, Lens Transparency=Clear, Luminous Intensity=6mcd, Mount="Surface Mount", Number of Elements=1, Number of LEDs=1, Number of Pins=2, Packaging="Tape and Reel", Power Rating=100mW, Radiation Hardening=No, Viewing Angle=130°, Wavelength=565nm, Width=0.8mm
P1: library part CMP-2000-05352-1, "Male Header, Pitch 1.27 mm, 2 x 5 Position, Height 6.12 mm, RoHS, Tube", Color=Black, Manufacturer=Samtec, Package Description="Male Header, Pitch 1.27 mm, 2 x 5 Position, Height 5.97 mm, Tail Length 4.32 mm", Package Reference=FTSH-105-01-L-DV-K, Category=Connectors,Interconnects, Connector Type=Header,Shrouded, Contact Finish=Gold, Contact Finish Thickness=3µin(0.08µm), Contact Mating Length="0.120\"(3.05mm)", Contact Type=MalePin, Datasheet URL=http://suddendocs.samtec.com/prints/ftsh-1xx-xx-xxx-dv-xxx-mkt.pdf, Datasheet Version="Rev. ET, 10/1995", Family=RectangularConnectors-Headers,MalePins, Fastening Type=-, Features=-, Manufacturer URL=http://www.samtec.com/, Mounting Type=SurfaceMount, Number of Positions=10, Number of Positions Loaded=All, Number of Rows=2, Package URL=http://suddendocs.samtec.com/prints/ftsh-1xx-xx-xxx-dv-xxx-footprint.pdf, Packaging=Tube, Pitch="0.050\"(1.27mm)", Row Spacing="0.050\"(1.27mm)", Series=FTSH, Termination=Solder
R1 R3 R4 R5 R6: library part CMP-2002-07353-1, Manufacturer="Yageo / Phycomp", Part Number=RC0402FR-0710KL
R2 R7 R8: library part CMP-2002-01154-4, "Chip Resistor, 4.7 KOhm, +/- 1%, 0.1 W, -55 to 155 degC, 0402 (1005 Metric), RoHS, Tape and Reel", Case Code (Imperial)=0402, Case Code (Metric)=1005, Max Operating Temperature="155 degC", Min Operating Temperature="-55 degC", Package Quantity=1, PartNumber=ERJ-2RKF4701X, Power Rating="100 mW", Resistance="4.7 KOhm", Tolerance=1%, Voltage Rating="50 V", Case\/Package=0402, ComponentLink1Description="Manufacturer URL", ComponentLink1URL=http://www.panasonic.com/, ComponentLink2Description=Datasheet, ComponentLink2URL=http://industrial.panasonic.com/cdbs/www-data/pdf/RDA0000/AOA0000C86.pdf, DatasheetVersion=04/2015, Height="0.35 mm", Length="1 mm", Mount="Surface Mount", Mounting Technology="Surface Mount", PackageDescription="2-Pin Surface Mount Device, Body 1 x 0.5 mm", PackageReference=0402, Packaging="Cut Tape", Pins=2, Radiation Hardening=No, REACH SVHC=Yes, RoHSCompliant=true, Width="0.5 mm"
R11: library part CMP-2001-03755-2, "RES Thick Film, 2kΩ, 1%, 0.125W, 100ppm/°C, 0805", Case Code (Imperial)=0805, Case Code (Metric)=2012, Max Operating Temperature=155°C, Max Power Dissipation=125mW, Min Operating Temperature=-55°C, Package Quantity=10, Resistance=2kR, Temperature Coefficient=100ppm/°C, Tolerance=1%, Voltage Rating=150V, Case/Package=0805, Composition="Thick Film", Contact Plating=Tin, Depth=1.25mm, Features="Automotive AEC-Q200", Height=0.02inch, Lead Free="Lead Free", Length=2mm, Military Standard=Not, Mount="Surface Mount", Number of Pins=2, Number of Terminals=2, Number of Terminations=2, Packaging="Tape and Reel", Power Rating=125mW, Radiation Hardening=No, Termination=SMD/SMT, Voltage Rating (DC)=150V, Weight=0.000194oz, Width=1.25mm, Working Voltage=150V
R30 R31: library part CMP-2002-00022-2, "RES Thick Film, 470Ω, 1%, 0.063W, 100ppm/°C, 0402", Case Code (Imperial)=0402, Case Code (Metric)=1005, Max Operating Temperature=155°C, Max Power Dissipation=63mW, Min Operating Temperature=-55°C, Package Quantity=10, Resistance=470R, Temperature Coefficient=100ppm/°C, Tolerance=1%, Voltage Rating=50V, Case/Package=0402, Composition="Thick Film", Contact Plating=Tin, Depth=0.5mm, Features="Automotive AEC-Q200", Height=0.35mm, Lead Free="Lead Free", Length=1mm, Military Standard=Not, Mount="Surface Mount", Number of Terminations=2, Packaging="Tape and Reel", Power Rating=63mW, Radiation Hardening=No, Termination=SMD/SMT, Voltage Rating (DC)=50V, Weight=2.3E-05oz, Width=0.5mm
RESET: library part CMP-2100-03586-2, "SWITCH TACTILE SPST-NO 0.05A 12V", Contact Current Rating=50mA, Contact Resistance=100mR, Insulation Resistance=100MR, Max Operating Temperature=70°C, Max Voltage Rating (DC)=12V, Min Operating Temperature=-25°C, Operating Force=1.5N, Package Quantity=1, Ratings="Dust Proof", Actuator Length=0.4mm, Actuator Type=Standard, Contact Material=Silver, Current Rating=50mA, Depth=2.5mm, Electrical Life=200000Cycles, Height=1.2mm, Illumination Type=Non-Illuminated, Lead Free="Lead Free", Length=4mm, Max Current Rating=50mA, Mechanical Life=200000Cycles, Mount="Surface Mount", Orientation=Straight, Packaging="Tape and Reel", Switch Function=Off-Mom, Switch Travel=0.15mm, Termination=SMD/SMT, Throw Configuration=SPST, Voltage Rating (DC)=12V, Weight=0.000776oz, Width=3mm
SD: library part CMP-2000-05825-1, "Micro SD Card, RA, -25 to 85 degC, 8-Pin SMD, RoHS, Tape and Reel", Current Rating=500mA, Manufacturer=Molex, Package Description="8-Pin Surface Mount Device, Body 11.95 x 11.4 mm, Pitch 1.1 mm", Voltage Rating=10VAC/DC, Brand=Molex, Card Type=microSD, Contact Material=PhosphorBronze, Contact Plating=Gold, Datasheet URL=http://www.molex.com/pdm_docs/sd/1040310811_sd.pdf, Datasheet Version="Rev. E, 04/2006", Height=1.42mm, Housing Material=LiquidCrystalPolymer(LCP), Insertion - Extraction Style=Push-Pull, Length=11.4mm, Manufacturer URL=http://www.molex.com/, Mating Cycles=10000, Mounting Technology=SurfaceMount, Mounting Type=Standard, Number of Contacts=8, Number of Rows=1Row, Orientation=RightAngle, Package Reference=104031-0811, Packaging=Reel, Pitch=1.1mm, Product=CardConnectors, Product Category=MemoryCardConnectors, RoHS=True, Series=104031, Termination Style=SMD
SD_LED: library part CMP-02520-000012-1, "LED RED 0603 SMD", Ambient Temperature Range High=+85°C, Ambient Temperature Range Low=-35°C, Colour=Red, Forward Current=20mA, Forward Voltage=2V, Manufacturer=Vishay, Manufacturer Part Number=VLMS1300-GS08, Package=6.541-5092.01-4, Power Dissipation=75mW, Reverse Voltage=5V, Temperature="-35°C to +85°C", Automotive=No, Category=Diode, ComponentLink2Description=Datasheet, ComponentLink2URL=http://www.vishay.com/docs/82437/vlmo1300.pdf, Device Class L1=Optoelectronics, Device Class L2=LEDs, Device Class L3=unset, Digikey Description="LED RED 0603 SMD", Height=1mm, Lead Free=Yes, Led Orientation="Top View", Luminous Intensity=54mcd, Mouser Description="Standard LEDs - SMD Super Red Clear Non-Diff", Octopart=https://octopart.com/vlms1300-gs08-vishay-21709201, Peak Emmision Wavelength=639nm, RoHS=TRUE, Temperature Range High=+85°C, Temperature Range Low=-35°C, Viewing Angle=130°, Wavelength=631nm
U1: library part CMP-0786-00152-1, "High Accuracy, Ultralow IQ, 1 A, anyCAP(R) Low Dropout Regulator, 2.7 to 8 V Vin, 3.3 V Vout, Industrial, 3-pin SOT223 (KC-3), Reel", Manufacturer="Analog Devices", Preset Vout Values (V)=3.3, Supply Current IGND @ Small Load=110uA, Code_JEDEC=TO-261-AA, ComponentLink1Description="Manufacturer URL", ComponentLink1URL=http://www.analog.com/en/index.html, ComponentLink2Description=Datasheet, ComponentLink2URL=http://www.analog.com/static/imported-files/data_sheets/ADP3338.pdf, ComponentLink3Description="Package Specification", ComponentLink3URL=http:/www.analog.com/static/imported-files/packages/PKG_PDF/SOT_223(KC)/KC_3.pdf, ComponentLink4Description="URL Link1", ComponentLink4URL="Product URL:http://www.analog.com/en/ADP3338/productSearch.html", DatasheetVersion="Rev. B", Iout max=1A, Mounting Technology="Surface Mount", PackageDescription="3-Pin Small Outline Transistor Package, Body 3.5 x 6.5 mm, Pitch 2.3 mm", PackageReference=KC-3, PackageVersion="11-20-2012-B, 11/2012", Packing=Reel, PartNumber=ADP3338AKCZ-3.3-RL, Vin (max) (V)=8, Vin (min) (V)=2.7

## Free pads (board coordinates)
  round 2.7 hole 2.4: 30(32.156,93.421) 30(66.142,93.421) 31(66.091,135.941)

## Via types
v1: diameter 0.6, hole 0.406, Top Layer to Bottom Layer, 26 vias
v2: diameter 0.6, hole 0.4, Top Layer to Bottom Layer, 14 vias
v3: diameter 0.6, hole 0.4, Top Layer to Layer 2, 14 vias
v4: diameter 0.38, hole 0.25, Top Layer to Bottom Layer, tented both sides, 13 vias
v5: diameter 0.38, hole 0.25, Top Layer to Layer 2, tented both sides, 10 vias
v6: diameter 0.38, hole 0.25, Top Layer to Layer 1, tented both sides, 10 vias
v7: diameter 0.6, hole 0.406, Top Layer to Layer 1, 1 vias

## Nets (pads, with @x,y where several pads share a name; then routed paths per layer and width w, separated by ;. In a path a pad name is that pad's centre, name@x,y a point inside that pad or via, vN(x,y) a via of type N, cw(c..) or ccw(c..) an arc to the next point about the centre after c; other vN are vias at no path point)
DVDD: C14.1 IC2.F2 IC2.G3 | length 3.9
  Top Layer w0.178: v4(40.488,124.257) 40.493,124.257 40.818,123.932 IC2.F2 IC2.G3
  Bottom Layer w0.178: v4(40.488,124.257) 41.148,123.596 41.148,122.109 C14.1
GND: BLE.1 C1.1 C2.2 C3.1 C4.1 C5.1 C6.1 C7.1 C10.1 C11.2 C12.2 C13.2 C14.2 C15.2 C16.2 C17.1 C21.1 C22.2 C30.2 C31.2 IC2.A1 IC2.B1 IC2.B2 IC2.C3 IC2.C11 IC2.D1 IC2.D4 IC2.D10 IC2.E3 IC2.G2 IC2.K4 IC2.K10 IC2.M12 J1.2 J1.4 J1.6 J1.8 J1.10 J2.2 J2.4 J2.6 J2.7 J2.8 J2.9 J2.10 J3.4 J3.5 J3.6 J3.7 J3.8 J3.9 L1_BLE.2 LED.1 P1.3 P1.5 P1.6 P1.7 P1.8 P1.9 RESET.2 SD.6 SD.11 SD.12 SD_LED.1 U1.1 | length 6.6
  Top Layer w0.127: v6(39.827,126.848) 39.843,126.848 40.158,126.532 IC2.B1@40.174,126.548 ; IC2.D1 40.174,125.202 40.418,124.958 v6(40.418,124.914) ; IC2.A1 40.446,126.91 40.446,126.805 ; IC2.B1@40.204,126.532 IC2.B1 40.446,126.805 ; v6(40.488,123.596) 40.499,123.596 40.813,123.282 IC2.G2 ; IC2.B2 40.551,126.805 40.446,126.805 ; IC2.E3 IC2.D4 42.113,125.232 41.819,125.527 v6(41.808,125.527) 41.808,125.537 41.474,125.872 IC2.C3 ; IC2.C11 46.679,125.882 46.984,126.187 v6(46.99,126.187) ; IC2.M12 47.631,119.725 v6(47.635,119.725)
  Top Layer w0.203: LED.1@47.796,109.444 LED.1 ; C2.2 C2.2@50.797,114.46 ; C22.2 54.661,127.653 C22.2@55.065,127.248 ; C5.1 C5.1@55.626,123.104
  Bottom Layer w0.203: J2.2 J2.2@66.286,116.415 ; J2.4 J2.4@66.286,117.329
  other v1: 35.204,93.777 32.563,97.841 60.757,98.146 37.643,99.771 65.574,102.12 46.838,104.292 32.664,104.496 45.759,107.62 41.91,107.798 42.164,110.642 39.167,110.998 55.575,111.049 32.664,111.506 40.538,112.979 58.411,113.068 36.271,114.808 50.749,118.516 32.741,119.355 53.721,119.863 55.905,120.929 59.487,126.187 49.265,134.005 55.016,134.061 60.757,135.941 41.961,136.906
  other v6: 44.094,122.069 42.367,123.241 45.876,123.281 44.094,124.507
  other v7: 41.402,129.642
IMU_CS: IC2.C7 J1.9 TP9.TP? | length 37.6
  Top Layer w0.178: IC2.C7@44.084,125.882 IC2.C7 44.074,125.867 44.755,125.186 v5(44.755,125.171)
  Top Layer w0.203: J1.9 61.709,116.472 61.011,115.773 v3(61.011,114.351) 61.011,113.284 62.382,111.912 65.938,111.912 66.205,111.646 66.205,111.471 66.443,111.233 TP9.TP?@66.618,111.233
  Layer 2 w0.178: v5(44.755,125.171) 45.415,124.511 45.415,122.479 49.998,117.896
  Layer 2 w0.203: 49.998,117.896 53.543,114.351 v3(61.011,114.351)
IMU_MISO: IC2.C8 J1.5 | length 25
  Top Layer w0.178: IC2.C8 44.724,125.872 45.414,125.181 v5(45.414,125.171)
  Top Layer w0.203: v3(60.046,118.516) 60.067,118.495 66.272,118.495 J1.5
  Layer 2 w0.178: v5(45.414,125.171) 45.89,124.696 45.89,124.092 49.222,120.759 49.998,120.759
  Layer 2 w0.203: 49.998,120.759 50.652,120.759 52.896,118.516 v3(60.046,118.516)
IMU_MOSI: IC2.A9 J1.3 | length 29.5
  Top Layer w0.178: IC2.A9 45.374,128.698 45.627,128.951
  Top Layer w0.203: 45.627,128.951 46.114,129.438 v3(46.842,129.438) ; v3(60.147,119.837) 60.255,119.837 60.618,119.474 J1.3
  Layer 2 w0.203: v3(46.842,129.438) 55.067,129.438 60.147,124.358 v3(60.147,119.837)
IMU_SCLK: IC2.B8 J1.7 | length 31.7
  Top Layer w0.127: IC2.B8 44.724,126.547 45.009,126.833 v5(45.009,126.848)
  Top Layer w0.203: v3(58.522,124.816) 58.522,118.466 59.515,117.472 J1.7
  Layer 2 w0.127: v5(45.009,126.848) 45.009,128.067 45.822,128.88 49.998,128.88
  Layer 2 w0.203: 49.998,128.88 54.458,128.88 v3(58.522,124.816)
NetANT_1: ANT.1 L2_BLE.1 | length 2.7
  Top Layer w0.508: L2_BLE.1 ANT.1@33.934,132.418
NetBLE_2: BLE.2 R30.2 | length 2.2
  Top Layer w0.381: BLE.2 65.557,131.813 65.557,129.684 R30.2
NetC1_BLE_1: C1_BLE.1 IC2.C1 | length 2.9
  Top Layer w0.508: C1_BLE.1@37.287,125.882 IC2.C1
NetC1_BLE_2: C1_BLE.2 L1_BLE.1 L2_BLE.2 | length 6.6
  Top Layer w0.508: L2_BLE.2 33.934,126.543 34.595,125.882 C1_BLE.2@36.205,125.882 ; L1_BLE.1 36.119,125.969 C1_BLE.2@36.205,125.882 ; C1_BLE.2 C1_BLE.2@36.205,125.882
NetC6_2: C6.2 IC2.N12 | length 4.6
  Top Layer w0.178: 47.119,117.674 47.324,117.878 IC2.N12
  Top Layer w0.203: C6.2 45.466,116.021 47.119,117.674
NetC16_1: C16.1 IC2.B5 L1.1 | length 22.2
  Top Layer w0.127: IC2.B5 42.774,126.538 43.078,126.842 v4(43.078,126.848)
  Top Layer w0.203: L1.1 52.019,133.858 C16.1 52.048,132.255 53.464,132.255 v2(53.492,132.283)
  Bottom Layer w0.127: v4(43.078,126.848) 43.078,128.951
  Bottom Layer w0.203: 43.078,128.951 43.078,132.69 45.517,135.128 50.902,135.128 53.492,132.537 v2(53.492,132.283)
NetC17_2: C17.2 IC2.B13 IC2.C4 | length 8
  Top Layer w0.127: IC2.B13 48.289,126.848 v4(48.362,126.848)
  Top Layer w0.178: IC2.C4 42.124,125.888 42.418,126.182 v4(42.418,126.187)
  Bottom Layer w0.127: C17.2 44.501,127 44.856,127.356 47.854,127.356 v4(48.362,126.848)
  Bottom Layer w0.178: v4(42.418,126.187) 44.399,126.187 C17.2
NetIC2_A3: IC2.A3 J3.2 | length 43.9
  Top Layer w0.178: v5(40.64,128.016) IC2.A3
  Top Layer w0.203: v3(57.81,102.718) 58.765,101.763 J3.2
  Layer 2 w0.178: v5(40.64,128.016) 41.351,128.727 42.977,128.727 44.501,127.203 44.501,125.509 44.349,125.357 44.349,124.985 44.501,124.833 44.501,117.674
  Layer 2 w0.203: 44.501,117.674 44.501,107.493 46.736,105.258 55.27,105.258 v3(57.81,102.718)
NetIC2_B3: IC2.B3 J3.3 TP6.TP? | length 47.2
  Top Layer w0.178: v5(41.148,126.848) 41.153,126.848 41.468,126.532 IC2.B3
  Top Layer w0.203: TP6.TP? 54.102,104.699 56.312,102.489 56.715,102.489 57.669,101.535 57.669,101.476 57.965,101.18 J3.3
  Layer 2 w0.178: v5(41.148,126.848) 41.148,127.813 41.605,128.27 42.418,128.27 43.536,127.152 43.536,117.674
  Layer 2 w0.203: 43.536,117.674 43.536,106.07 47.041,102.565 v3(56.236,102.565)
NetIC2_B4: IC2.B4 L1.2 | length 23.3
  Top Layer w0.127: IC2.B4 42.124,126.543 42.418,126.837 v4(42.418,126.848)
  Top Layer w0.203: L1.2 53.675,135.361 v2(54.356,136.042)
  Bottom Layer w0.127: v4(42.418,126.848) 42.418,128.951
  Bottom Layer w0.203: 42.418,128.951 42.418,133.452 45.771,136.804 53.594,136.804 v2(54.356,136.042)
NetIC2_G11: IC2.G11 R31.1 | length 21.6
  Top Layer w0.178: IC2.G11 46.674,123.287 46.969,123.582 v4(46.969,123.587)
  Top Layer w0.203: R31.1@62.772,128.389 R31.1 R31.1@62.772,128.389
  Top Layer w0.381: R31.1 63.017,128.583 63.017,126.06 v2(63.043,126.035)
  Bottom Layer w0.178: v4(46.969,123.587) 49.998,126.615
  Bottom Layer w0.381: 49.998,126.615 50.484,127.102 61.976,127.102 v2(63.043,126.035)
NetIC2_G12: IC2.G12 R30.1 | length 22.2
  Top Layer w0.178: IC2.G12 47.324,123.273 47.65,122.946 v4(47.65,122.936)
  Top Layer w0.381: v2(65.532,126.035) 65.557,126.06 65.557,128.583 R30.1
  Bottom Layer w0.178: v4(47.65,122.936) 49.998,122.936
  Bottom Layer w0.381: 49.998,122.936 50.76,123.698 63.195,123.698 v2(65.532,126.035)
NetIC2_M1: IC2.M1 P1.2 TP11.TP? | length 58.1
  Top Layer w0.178: 38.568,119.431 39.572,119.431 IC2.M1
  Top Layer w0.254: 38.568,119.431 35.713,119.431 35.052,118.77 35.052,96.977 39.726,92.304 48.463,92.304 50.698,94.539 50.698,99.771 49.784,100.686 P1.2@46.866,100.686 ; P1.2 P1.2@46.866,100.686 ; TP11.TP? 47.109,101.872 47.109,100.929 P1.2@46.866,100.686
NetIC2_N2: IC2.N2 P1.4 | length 47
  Top Layer w0.178: IC2.N2 41.905,118.301 41.905,117.674
  Top Layer w0.203: 41.905,117.674 41.905,116.659 36.576,111.33 36.576,97.333 40.538,93.37 47.701,93.37 49.733,95.402 49.733,98.196 48.514,99.416 P1.4
NetLED_2: LED.2 R11.1 | length 2.9
  Top Layer w0.381: LED.2 49.516,109.663 52.149,109.663 R11.1
NetR4_1: R4.1 SD.8 | length 4.6
  Bottom Layer w0.381: SD.8 62.41,93.1 62.41,94.719 63.277,95.586 R4.1
NetR6_1: R6.1 SD.1 | length 4.8
  Bottom Layer w0.203: R6.1@50.636,94.304 R6.1 53.697,94.265 54.749,93.214 SD.1
NetR7_1: R7.1 SD.9 | length 3
  Bottom Layer w0.203: R7.1 50.867,101.171 50.876,101.171 51.615,100.432 51.615,99.637 52.014,99.239 SD.9
NetR8_1: R8.1 SD.10 | length 2.3
  Bottom Layer w0.203: R8.1 51.968,103.084 SD.10
NetR31_2: R31.2 SD_LED.2 | length 2.2
  Top Layer w0.381: SD_LED.2 62.941,131.736 62.941,129.709 R31.2
PPG_SCLK: IC2.M11 J2.5 | length 39.2
  Top Layer w0.178: IC2.M11 46.674,120.016 46.977,119.712 v4(46.977,119.684)
  Bottom Layer w0.178: 40.556,117.674 40.556,118.521 40.805,118.77 46.736,118.77 46.977,119.011 v4(46.977,119.684) ; 48.924,117.674 49.631,118.381 49.631,120.247 49.998,120.614
  Bottom Layer w0.203: 40.556,117.674 40.556,117.417 40.93,117.043 48.293,117.043 48.924,117.674 ; 49.998,120.614 50.969,121.585 61.105,121.585 64.817,117.873 J2.5
PPG_SDA: IC2.L13 J2.3 TP5.TP? | length 23.2
  Top Layer w0.178: IC2.L13 48.565,120.091 49.998,120.091
  Top Layer w0.203: 49.998,120.091 v2(50.394,120.091)
  Bottom Layer w0.203: v2(50.394,120.091) 53.035,117.45 ; TP5.TP? 53.719,115.445 53.035,116.129 53.035,117.45 ; J2.3 65.596,116.872 65.545,116.923 65.469,116.923 65.426,116.966 65.077,116.966 64.593,117.45 53.035,117.45
RST: IC2.A8 P1.10 R2.1 RESET.1 | length 66.3
  Top Layer w0.178: 44.429,128.951 44.724,128.657 ; IC2.A8 44.724,128.657 ; 45.018,128.951 44.724,128.657
  Top Layer w0.203: v3(39.675,96.215) 39.675,95.301 40.64,94.336 45.11,94.336 45.825,95.05 45.825,95.337 46.093,95.606 P1.10 ; v3(43.739,129.642) 44.429,128.951 ; 45.018,128.951 45.155,129.088 45.155,129.663 45.586,130.094 47.468,130.094 cw(c47.549,129.443) 47.496,130.097 48.355,130.956 R2.1@49.228,130.956 ; R2.1 49.597,130.686 49.606,130.686 49.736,130.556 55.677,130.556 57.011,131.89 57.011,132.872 57.31,133.17 RESET.1
  Layer 2 w0.178: 38.568,127.417 40.102,128.951
  Layer 2 w0.203: 38.568,127.417 37.495,126.344 37.495,103.883 39.675,101.703 v3(39.675,96.215) ; 40.102,128.951 40.792,129.642 v3(43.739,129.642)
SD_CLK: IC2.N9 SD.5 | length 57.4
  Top Layer w0.178: 44.369,117.674 45.374,118.678 IC2.N9
  Top Layer w0.203: v2(38.579,105.667) 38.579,104.474 39.147,103.906 42.336,103.906 43.231,104.8 43.231,112.827 41.505,114.553 41.505,115.612 42.576,116.683 43.379,116.683 44.369,117.674
  Bottom Layer w0.203: v2(38.579,105.667) 38.579,94.975 41.748,91.805 58.696,91.805 59.149,92.258 SD.5
SD_CS: IC2.L8 R5.1 SD.2 | length 50.4
  Top Layer w0.178: IC2.L8 45.01,120.396 45.01,120.324 v4(45.049,120.285)
  Top Layer w0.203: v2(55.067,95.961) 57.201,95.961 v2(58.725,97.485)
  Bottom Layer w0.178: 38.568,119.238 39.615,120.285 v4(45.049,120.285)
  Bottom Layer w0.203: 38.568,119.238 37.795,118.466 37.795,116.942 48.519,106.218 48.519,99.601 49.591,98.529 50.372,98.529 50.495,98.405 R5.1 57.83,98.38 v2(58.725,97.485) ; v2(55.067,95.961) 55.525,95.503 55.525,93.412 SD.2
SD_MISO_DO: IC2.M9 R3.1 SD.7 | length 49.3
  Top Layer w0.178: IC2.M9 v4(45.72,119.685)
  Bottom Layer w0.178: 39.37,117.674 39.37,118.821 40.234,119.685 v4(45.72,119.685)
  Bottom Layer w0.203: 39.37,117.674 39.37,117.145 48.616,107.899 55.614,107.899 64.692,98.821 64.85,98.821 64.973,98.698 64.973,98.648 64.85,98.525 64.741,98.525 61.349,95.133 SD.7
SD_MOSI_DI: IC2.L9 R1.1 SD.3 TP4.TP? | length 51.5
  Top Layer w0.178: IC2.L9 45.378,120.682 45.715,120.345 v4(45.72,120.345)
  Bottom Layer w0.178: 38.568,120.711 38.811,120.955 45.102,120.955 45.712,120.345 v4(45.72,120.345)
  Bottom Layer w0.203: 38.568,120.711 37.084,119.228 37.084,109.423 49.409,97.098 ; TP4.TP? 45.949,97.098 49.409,97.098 ; SD.3 56.625,93.412 56.625,95.927 55.454,97.098 50.648,97.098 R1.1 50.628,97.098 49.409,97.098
VCC: C3.2 C4.2 C31.1 FB1.1 FB2.2 FB3.1 IC2.A2 J1.1 J2.1 P1.1 R1.2 R3.2 R4.2 R5.2 R6.2 R7.2 R8.2 R11.2 SD.4 TP2.TP? U1.2 | length 218.9
  Top Layer w0.178: 39.055,128.951 IC2.A2
  Top Layer w0.381: 39,129.006 39,131.774 39.37,132.144 ; C3.2@39.37,132.642 39.37,132.144 ; P1.1@43.029,100.865 42.849,100.686 P1.1 42.31,102.407 v3(43.231,103.327) 46.279,106.375 v1(56.032,106.375) 57.353,107.696 58.705,107.696 ; FB1.1 47.676,116.129 46.787,115.239 46.787,113.589 47.6,112.776 51.897,112.776 53.289,114.168 53.289,118.494 50.512,121.272 50.512,126.519 FB2.2@51.181,127.189 ; FB2.2 FB2.2@51.181,127.189 ; U1.2 58.705,107.696 ; TP2.TP? 61.112,134.061 61.112,133.807 ; J1.1 66.294,124.155 65.684,124.765 62.484,124.765 61.112,126.136 ; 39.37,132.144 40.148,131.365 40.529,131.365 C4.2 41.199,132.016 41.199,134.061 42.012,134.874 44.094,134.874 45.364,133.604 FB3.1 46.446,132.399 47.549,133.502 47.549,135.89 48.514,136.855 58.064,136.855 61.112,133.807 ; FB2.2@51.181,127.189 50.394,127.976 50.394,128.958 51.179,129.743 55.474,129.743 57.861,127.356 ; 57.861,127.356 56.794,126.289 v2(56.794,115.773) 56.794,114.28 54.088,111.574 R11.2 54.24,109.474 56.554,109.474 57.252,110.172 C31.1 57.39,110.056 57.39,109.011 58.705,107.696 ; 57.861,127.356 59.893,127.356 61.112,126.136 ; 61.112,126.136 61.112,133.807
  Layer 2 w0.381: v3(43.231,103.327) 44.602,103.327 48.015,99.915 49.132,99.915 v2(49.174,99.873) 49.174,96.34 48.983,96.149 v2(48.983,96.09)
  Bottom Layer w0.381: v2(48.983,96.09) 50.058,95.015 R6.2 ; v2(49.174,99.873) 49.857,99.19 50.461,99.19 50.495,99.155 R5.2 ; R7.2 50.511,100.726 50.201,100.726 49.978,100.95 49.978,103.966 R8.2 51.4,105.388 51.4,105.523 52.253,106.375 v1(56.032,106.375) 57.742,104.665 57.921,104.665 59.792,102.794 59.792,95.453 58.283,93.945 58.283,93.323 SD.4 ; R6.2@50.587,95.05 50.587,96.282 50.648,96.343 R1.2 ; v2(56.794,115.773) 61.76,115.773 62.503,116.516 ; 62.567,116.516 64.433,116.516 65.126,115.824 66.192,115.824 66.916,115.1 66.916,98.869 v2(66.548,98.501) 66.489,98.501 65.911,97.923 R3.2 64.973,96.412 65.024,96.361 R4.2 65.024,96.311 R4.2@65.059,96.277
VCC_FB2: C5.2 C7.2 C21.2 C22.1 FB2.1 IC2.A10 IC2.A13 IC2.D11 IC2.M4 R2.2 TP3.TP? | length 65.1
  Top Layer w0.127: IC2.A13 49.276,128.485 49.276,128.951
  Top Layer w0.178: v5(41.782,120.41) 41.782,120.391 42.124,120.049 IC2.M4 ; v5(46.533,128.347) 46.024,127.838 IC2.A10 46.451,127.61 47.546,127.61 IC2.A13 ; IC2.D11 46.685,125.232 46.979,125.527 v5(46.99,125.527)
  Top Layer w0.203: v3(42.16,115.34) 46.025,111.476 ; TP3.TP? 45.387,109.564 46.025,110.201 46.025,111.476 ; 49.276,128.951 R2.2 ; FB2.1 52.513,128.539 52.934,128.118 52.934,126.617 ; C21.2 51.968,125.52 52.066,125.619 52.066,125.75 52.934,126.617 ; v3(52.273,123.342) 52.278,123.347 52.98,123.347 53.188,123.139 53.237,123.139 ; C7.2 52.933,121.818 53.031,121.917 53.237,122.123 53.237,123.139 ; C7.2@53.031,121.818 54.254,121.818 54.813,121.26 54.813,113.792 52.497,111.476 46.025,111.476 ; 52.934,126.617 53.393,126.158 54.65,126.158 C22.1 54.341,125.827 C5.2 53.237,123.139
  Layer 2 w0.178: 40.594,117.674 40.594,119.791 41.213,120.41 v5(41.782,120.41) ; v5(46.533,128.347) 46.99,127.89 v5(46.99,125.527) 46.99,124.562 48.209,123.342 49.998,123.342
  Layer 2 w0.203: 40.594,117.674 40.594,116.835 42.089,115.34 v3(42.16,115.34) ; 49.998,123.342 v3(52.273,123.342)
VDD: C30.1 J3.1 TP1.TP? U1.3 | length 13.6
  Top Layer w0.381: C30.1 57.325,104.8 58.037,105.512 59.802,105.512 U1.3 59.825,105.396 59.565,105.136 J3.1 59.625,100.364 59.625,101.24 61.611,103.226 TP1.TP?
VDD_NS: C10.2 C11.1 FB3.2 IC2.A5 | length 9
  Top Layer w0.178: 42.672,128.951 42.672,127.294 42.774,127.192 IC2.A5
  Top Layer w0.203: 42.672,128.951 C11.1@42.672,131.311 ; C11.1 42.755,131.311 43.017,131.049 FB3.2 45.496,130.918 C10.2
VDDA: C1.2 C2.1 FB1.2 IC2.M13 IC2.N13 | length 11.4
  Top Layer w0.178: IC2.M13@47.985,120.02 IC2.M13 47.974,120.016 48.041,119.948 48.041,119.466 47.974,119.399 IC2.N13 49.682,117.674
  Top Layer w0.203: FB1.2 48.696,114.779 49.802,115.885 50.618,115.885 C2.1 51.441,115.965 52.019,116.544 C1.2 51.867,117.253 50.103,117.253 49.682,117.674
VDDR: C12.1 C13.1 FB4.1 IC2.C2 IC2.D2 IC2.E2 | length 23.9
  Top Layer w0.178: 38.568,118.06 v4(41,118.06) ; IC2.E2 IC2.D2 IC2.C2 40.833,125.882 41.138,126.187 v4(41.148,126.187)